# Altium PCB PCB2.PcbDoc
Units mm, origin at the board's own origin, x right, y up, seen from the top; angles counter-clockwise.
Board outline 160 x 101 mm, 2 copper layers (Top Layer, Bottom Layer); 127 components, 60 nets, 327 pads, 105 vias.
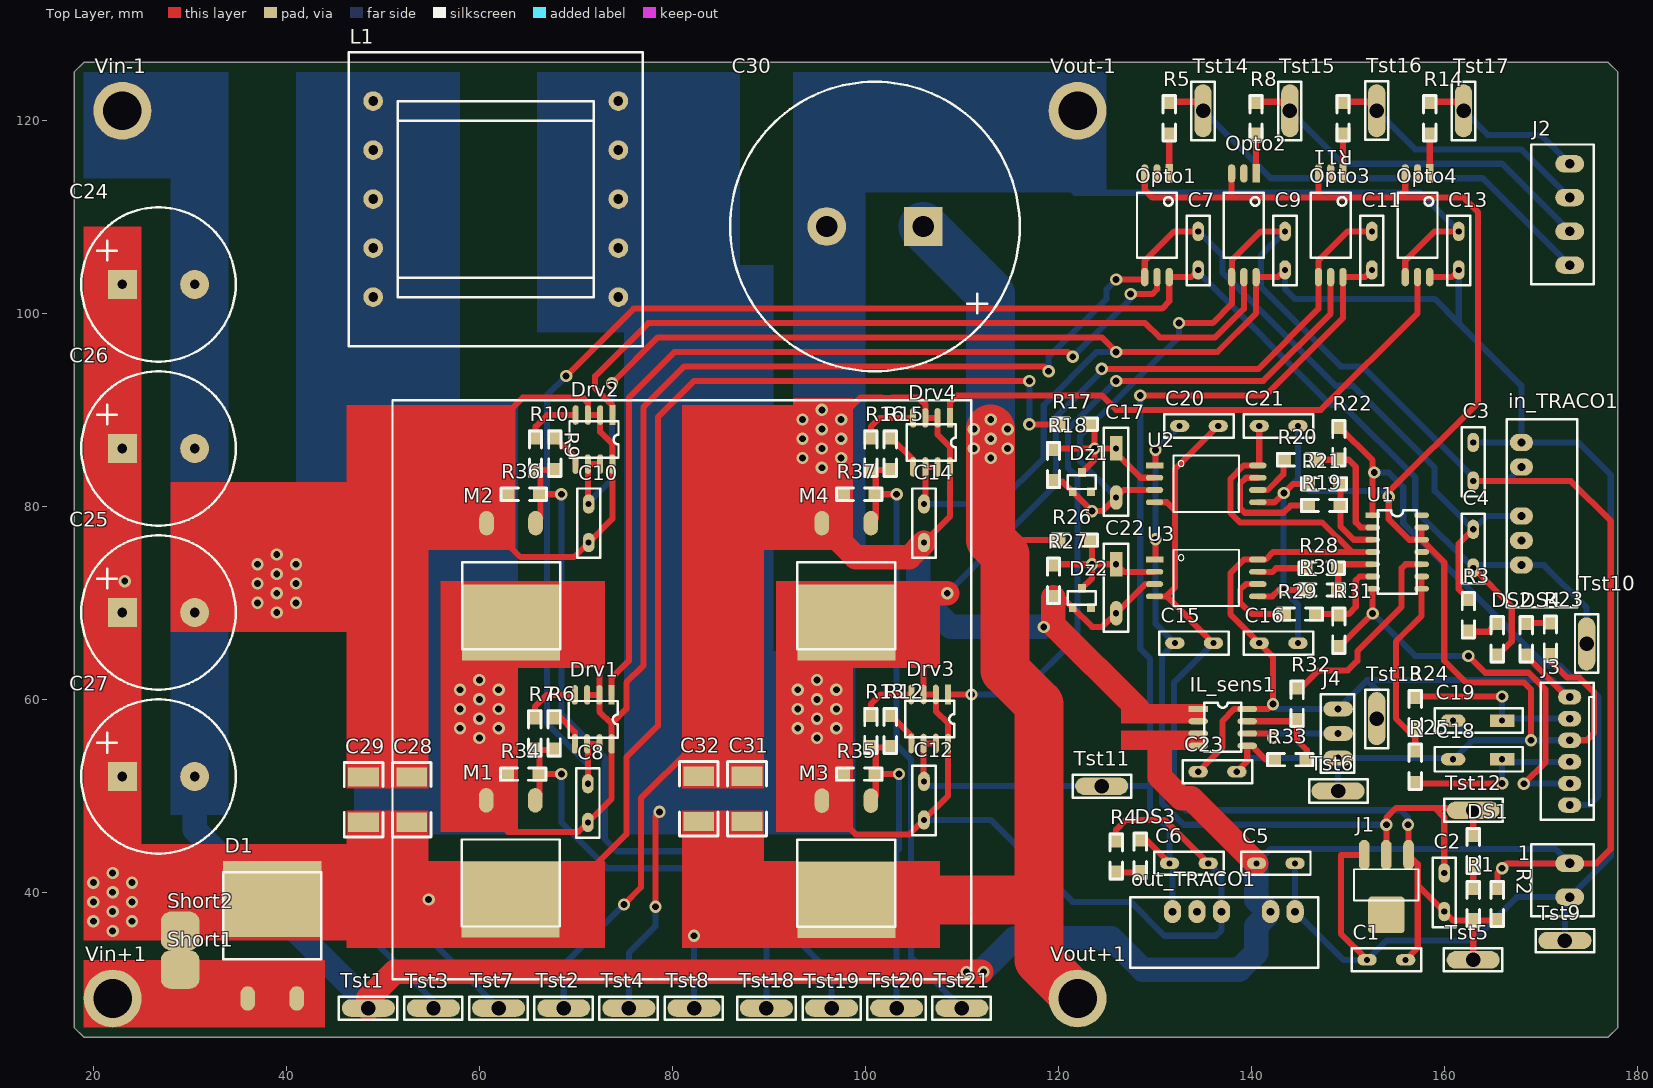
[diagram p0: Top Layer view]
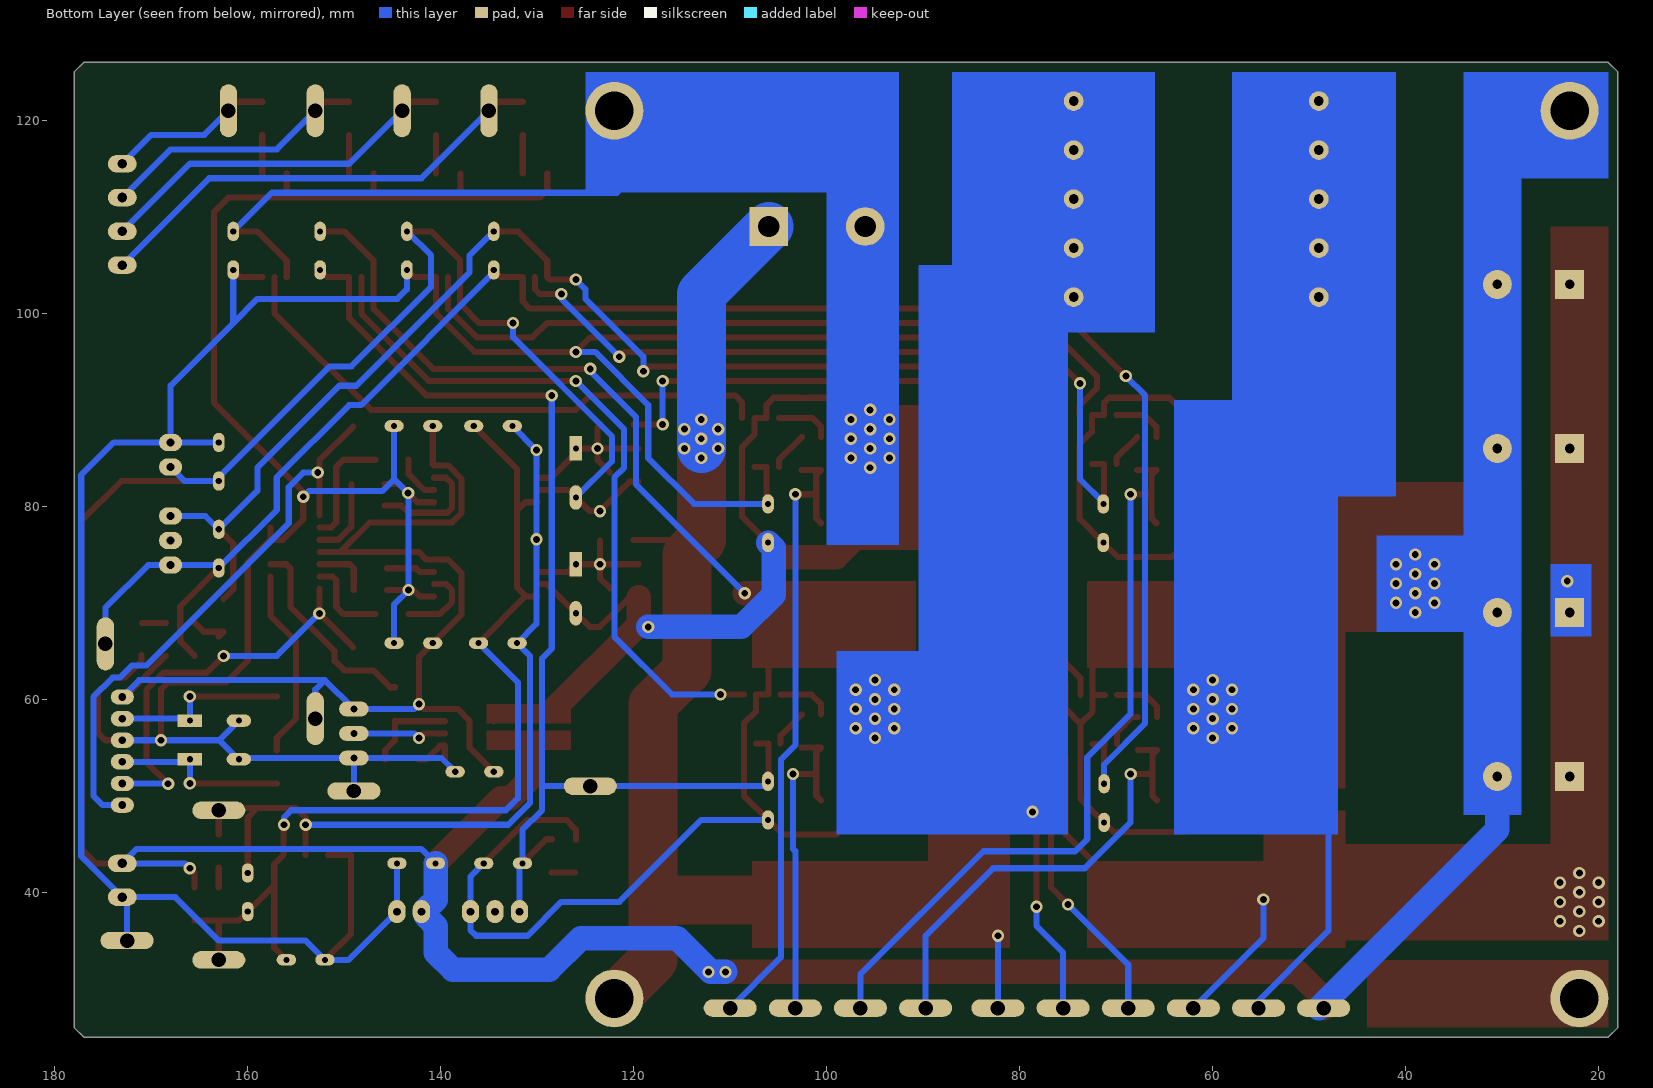
[diagram p1: Bottom Layer view, seen from below]

## Layer stack, top to bottom
Top Solder: solder mask 0.0102, Solder Resist, Dk 3.5
Top Layer: signal copper 0.0356
Dielectric 1: dielectric 0.32, FR-4, Dk 4.8
Bottom Layer: signal copper 0.0356
Bottom Solder: solder mask 0.0102, Solder Resist, Dk 3.5

## Board outline
18,125 19,126 177,126 178,125 178,26 177,25 19,25 18,26

## Design rules (kind name [scope] priority, off if disabled: settings)
Clearance Clearance_1 [All] p1: gap=0.3
Clearance [All] p2: gap=0.254
PolygonConnect [All] p1: connectstyle=Relief reliefconductorwidth=0.254 reliefentries=4 polygonreliefangle="90 Angle" airgapwidth=0.254
RoutingVias [All] p1: holewidth=0.711 width=1.27 viastyle="Through Hole" minholewidth=0.711 minwidth=1.27 maxholewidth=0.711 maxwidth=1.27
SolderMaskExpansion [All] p1: expansion=0.102
Width [All] p1: maxlimit=10 minlimit=0.3 preferedwidth=0.6
30 further rules are at their usual default settings.

## Classes and differential pairs
component class Signal_processing: B? C15 C16 C17 C18 C19 C20 C21 C22 C23 DS4 Dz1 Dz2 IL_sens1 J3 J4 R17 R18 R19 R20 R21 R22 R23 R24 R25 R26 R27 R28 R29 R30 R31 R32 R33 U1 U2 U3 U?
component class Drivers: C7 C8 C9 C10 C11 C12 C13 C14 C? Drv1 Drv2 Drv3 Drv4 IC? J2 Opto1 Opto2 Opto3 Opto4 R5 R6 R7 R8 R9 R10 R11 R12 R13 R14 R15 R16 Tst14 Tst15 Tst16 Tst17 Tst18 Tst19 Tst20 Tst21
component class Power_supplies: 1 C1 C2 C3 C4 C5 C6 DS1 DS2 DS3 in_TRACO1 J1 out_TRACO1 R1 R2 R3 R4 Tst1 Tst2 Tst3 Tst4 Tst5 Tst6 Tst7 Tst8 Tst9 Tst10 Tst11 Tst12 Tst13
component class Switches: C24 C25 C26 C27 C28 C29 C31 C32 D1 L1 M1 M2 M3 M4 R34 R35 R36 R37 Short1 Short2 Vin+1 Vin-1 Vout+1 Vout-1

## Components (designator, comment, footprint, x,y, rotation, side; value= is the part's Value field where it differs from the comment)
1 "Cleva 2 vias" "CON2_EXTRON _3.5MMPITCH" 173,43 r270 top
C1 "100nF" CAP100NF_AAU 156,33 r180 top
C2 "100nF" CAP100NF_AAU 160,38 r90 top
C3 "100nF" CAP100NF_AAU 163,82.62 r90 top
C4 "100nF" CAP100NF_AAU 163,73.62 r90 top
C5 "100nF" CAP100NF_AAU 140.54,43 r0 top
C6 "100nF" CAP100NF_AAU 131.54,43 r0 top
C7 "100nF" CAP100NF_AAU 134.5,104.5 r90 top
C8 "100nF" CAP100NF_AAU 71.253,47.25 r90 top
C9 "100nF" CAP100NF_AAU 143.5,104.5 r90 top
C10 "100nF" CAP100NF_AAU 71.33,76.25 r90 top
C11 "100nF" CAP100NF_AAU 152.5,104.5 r90 top
C12 "100nF" CAP100NF_AAU 106.08,47.5 r90 top
C13 "100nF" CAP100NF_AAU 161.5,104.5 r90 top
C14 "100nF" CAP100NF_AAU 106.08,76.25 r90 top
C15 "100nF" CAP100NF_AAU 136.08,65.83 r180 top
C16 "100nF" CAP100NF_AAU 144.83,65.83 r180 top
C17 "66nF" "CONDENSADOR_MKP_200MILIS - DUPLICATE" 126,86 r270 top
C18 "4.7nF" "CONDENSADOR_MKP_200MILIS - DUPLICATE" 166,53.79 r180 top
C19 "470pF" "CONDENSADOR_MKP_200MILIS - DUPLICATE" 166,57.79 r180 top
C20 "100nF" CAP100NF_AAU 136.58,88.33 r180 top
C21 "100nF" CAP100NF_AAU 144.83,88.33 r180 top
C22 "27nF" "CONDENSADOR_MKP_200MILIS - DUPLICATE" 126,74 r270 top
C23 "100nF" CAP100NF_AAU 138.5,52.5 r180 top
C24 "470µF" CE_16DX35MM_PITCH7.5MM 23,103 r0 top
C25 "470µF" CE_16DX35MM_PITCH7.5MM 23,69 r0 top
C26 "470µF" CE_16DX35MM_PITCH7.5MM 23,86 r0 top
C27 "470µF" CE_16DX35MM_PITCH7.5MM 23,52 r0 top
C28 "100nF" 1812 53,47.25 r90 top
C29 "1uF" 1812 48,47.25 r90 top
C30 "820µF" CE_30DX35MM_PITCH10MM 106,109 r180 top
C31 "100nF" 1812 87.739,47.338 r90 top
C32 "1uF" 1812 82.739,47.338 r90 top
D1 "????" "D2PAK - DIODE" 36,29 r0 top
Drv1 "NCP81074A" NCP81074A 73.713,60.463 r270 top
Drv2 "NCP81074A" NCP81074A 73.79,89.463 r270 top
Drv3 "NCP81074A" NCP81074A 108.58,60.5 r270 top
Drv4 "NCP81074A" NCP81074A 108.761,89.162 r270 top
DS1 "Verde" "LED SMD" 163,46 r270 top
DS2 "Verde" "LED SMD" 165.5,64.5 r90 top
DS3 "Verde" "LED SMD" 128.5,45.5 r270 top
DS4 "Verde" "LED SMD" 168.5,64.5 r90 top
Dz1 "4.7V" "SOT23 - ZENNER" 121.5,81.5 r0 top
Dz2 "4.7V" "SOT23 - ZENNER" 121.5,69.5 r0 top
IL_sens1 "ACS723LLCTR-20AB-T" SOIC8_GND 134.5,59 r0 top
in_TRACO1 "TRACO" TRACO_TMA1212S 168,86.62 r270 top
J1 "LD1117" SOT-223_LM1117 154,40.766 r180 top
J2 "CON4" "CON4_EXTRON _3.5MMPITCH" 173,115.5 r270 top
J3 "CON6" ? 173,49.04 r90 top
J4 "Cleva 2 vias" CON_3_100MILIS 149,59 r0 top
L1 "mH" E30 49,122 r0 top
M1 "MOSFET N" "D2PAK - MOSFET" 65.793,49.537 r180 top
M2 "MOSFET N" "D2PAK - MOSFET" 65.83,78.25 r180 top
M3 "MOSFET N" "D2PAK - MOSFET" 100.58,49.5 r180 top
M4 "MOSFET N" "D2PAK - MOSFET" 100.58,78.25 r180 top
Opto1 "ACPL-W70L" SSOIC6 131.5,114.5 r270 top
Opto2 "ACPL-W70L" SSOIC6 140.5,114.5 r270 top
Opto3 "ACPL-W70L" SSOIC6 149.5,114.5 r270 top
Opto4 "ACPL-W70L" SSOIC6 158.5,114.5 r270 top
out_TRACO1 "TRACO" TRACO_TMA1212S 144.54,38 r180 top
R1 "RK" 1206 163,40.5 r270 top
R2 "Res. Bridge" 1206 165.5,40.5 r270 top
R3 "RK" 1206 162.5,67 r90 top
R4 "RK" 1206 126,42 r90 top
R5 "560OHM" 1206 131.5,118.5 r90 top
R6 "25" 1206 67.753,54.75 r90 top
R7 "560OHM" 1206 65.753,54.75 r90 top
R8 "560OHM" 1206 140.5,118.5 r90 top
R9 "560OHM" 1206 67.83,83.75 r90 top
R10 "560OHM" 1206 65.83,83.75 r90 top
R11 "560OHM" 1206 149.5,118.5 r90 top
R12 "560OHM" 1206 102.58,55 r90 top
R13 "560OHM" 1206 100.58,55 r90 top
R14 "560OHM" 1206 158.5,118.5 r90 top
R15 "560OHM" 1206 102.58,83.75 r90 top
R16 "560OHM" 1206 100.58,83.75 r90 top
R17 "47k" 1206 120,88.5 r0 top
R18 "2k" 1206 119.5,86 r270 top
R19 "11k" 1206 145.83,80.08 r0 top
R20 "11k" 1206 143.33,84.83 r0 top
R21 "27k" 1206 149.255,82.33 r180 top
R22 "27k" 1206 149.08,84.83 r90 top
R23 "RK" 1206 171,68 r270 top
R24 "6k8" 1206 157,60.29 r270 top
R25 "680k" 1206 157,51.29 r90 top
R26 "120k" 1206 120,76.5 r0 top
R27 "2k" 1206 119.5,74 r270 top
R28 "11k" 1206 145.58,73.58 r0 top
R29 "11k" 1206 143.33,68.83 r0 top
R30 "27k" 1206 149.005,71.33 r180 top
R31 "27k" 1206 149.08,68.83 r270 top
R32 "10k" 1206 144.75,61.25 r270 top
R33 "10k" 1206 145.75,53.75 r180 top
R34 "68K" 1206 66.253,52.25 r180 top
R35 "68K" 1206 101.08,52.25 r180 top
R36 "68K" 1206 66.33,81.25 r180 top
R37 "68K" 1206 101.08,81.25 r180 top
Short1 "CON1" SHORTPAD 29,32 r270 top
Short2 "CON1" SHORTPAD 29,36 r270 top
Tst1 "Test Point" TEST_POINT 48.5,28 r90 top
Tst2 "Test Point" TEST_POINT 68.75,28 r90 top
Tst3 "Test Point" TEST_POINT 55.25,28 r90 top
Tst4 "Test Point" TEST_POINT 75.5,28 r90 top
Tst5 "Test Point" TEST_POINT 163,33 r90 top
Tst6 "Test Point" TEST_POINT 149,50.5 r270 top
Tst7 "Test Point" TEST_POINT 62,28 r90 top
Tst8 "Test Point" TEST_POINT 82.25,28 r90 top
Tst9 "Test Point" TEST_POINT 172.5,35 r270 top
Tst10 "Test Point" TEST_POINT 174.75,65.75 r0 top
Tst11 "Test Point" TEST_POINT 124.5,51 r270 top
Tst12 "Test Point" TEST_POINT 163,48.5 r270 top
Tst13 "Test Point" TEST_POINT 153,58 r180 top
Tst14 "Test Point" TEST_POINT 135,121 r180 top
Tst15 "Test Point" TEST_POINT 144,121 r180 top
Tst16 "Test Point" TEST_POINT 153,121 r0 top
Tst17 "Test Point" TEST_POINT 162,121 r180 top
Tst18 "Test Point" TEST_POINT 89.75,28 r270 top
Tst19 "Test Point" TEST_POINT 96.5,28 r270 top
Tst20 "Test Point" TEST_POINT 103.25,28 r90 top
Tst21 "Test Point" TEST_POINT 110,28 r90 top
U1 "LMC6484IM" SOIC_14 152.58,79.08 r0 top
U2 "ACPL-C870-000E" SSOP8 135.33,82.33 r0 top
U3 "ACPL-C870-000E" SSOP8 135.33,72.58 r0 top
Vin+1 "CON1" POWERHOLE 22,29 r0 top
Vin-1 "CON1" POWERHOLE 23,121 r0 top
Vout+1 "CON1" POWERHOLE 122,29 r0 top
Vout-1 "CON1" POWERHOLE 122,121 r0 top

## Footprints (in the part's own frame and the unit in brackets; to place one, negate y for a bottom-side part, rotate by r counter-clockwise, add the part's x,y. Pads: shape width x height; smd on the part's side, far side on the other; paste and mask are expansions set on the pad)
1206 [mil] "SMD R&C"
  rect 60x60 smd: 1(0,0) 2(135,0)
  silkscreen extent -25,-25 160,25, body extent 2,-31 128,31
1812 [mm]
  rect 2x3.2 smd: 1(0,0) 2(4.7,0)
  silkscreen extent -1.5,-2 6.2,2
CAP100NF_AAU [mm] "10nF 1600v"
  oval 2x1.2 hole 0.635: 1(0,0) 2(4,0)
  silkscreen extent -1.6,-1.2 5.6,1.2
CE_16DX35MM_PITCH7.5MM [mm]
  rect 3x3 hole 1: 1(0,0)
  round 3 hole 1: 2(7.5,0)
  silkscreen extent -4.25,-8 11.75,8
CE_30DX35MM_PITCH10MM [mm]
  rect 4x4 hole 2.2: 1(0,0)
  round 4 hole 2.2: 2(10,0)
  silkscreen extent -10,-15 20,15
"CON2_EXTRON _3.5MMPITCH" [mm]
  oval 1.8x3 hole 1: 1(0,0) 2(3.5,0)
  silkscreen extent -2,-4 5.5,2.5
"CON4_EXTRON _3.5MMPITCH" [mm]
  oval 1.8x3 hole 1: 1(0,0) 2(3.5,0) 3(7,0) 4(10.5,0)
  silkscreen extent -2,-4 12.5,2.5
CON_3_100MILIS [mil]
  oval 120x60 hole 29.53: 1(0,0) 2(0,-100) 3(0,-200)
  silkscreen extent -70,-260 65,60
"CONDENSADOR_MKP_200MILIS - DUPLICATE" [mm] "10nF 1600v"
  rect 2.54x1.27 hole 0.635: 1(0,0)
  oval 2.54x1.27 hole 0.635: 2(5.08,0)
  silkscreen extent -2.12,-1.27 6.98,1.27
"D2PAK - DIODE" [mil] "TO220-superficie"
  oval 60x100 smd: A(0,0) A(200,0)
  rect 400x310 smd: K(100,405)
  silkscreen extent -100,160 300,515
"D2PAK - MOSFET" [mil] "TO220-superficie"
  rect 400x310 smd: D(100,405)
  oval 60x100 smd: G(0,0) S(200,0)
  silkscreen extent -100,160 300,515
E30 [mil]
  round 80 hole 40: 1(0,-800) 1(0,-600) 1(0,-400) 1(0,-200) 1(0,0) 2(1000,-800) 2(1000,-600) 2(1000,-400) 2(1000,-200) 2(1000,0)
  silkscreen extent -100,-1000 1100,200
"LED SMD" [mil] "SMD R&C"
  rect 60x60 smd: A(0,0) K(135,0)
  silkscreen extent -25,-25 160,25
NCP81074A [mil] "Driver"
  rect 80x25 smd: 1(0,0)
  oval 80x25 smd: 2(0,-50) 3(0,-100) 4(0,-150) 5(200,-150) 6(200,-100) 7(200,-50) 8(200,0)
  silkscreen extent 25,-175 175,25
POWERHOLE [mm]
  round 6 hole 4: 1(0,0)
SHORTPAD [mm]
  rrect50% 4x4 smd: 1(0,0)
SOIC8_GND [mil] "Con plano de masa inferior"
  rect 80x25 smd: 1(0,0)
  oval 80x25 smd: 2(0,-50) 3(0,-100) 4(0,-150) 5(200,-150) 6(200,-100) 7(200,-50) 8(200,0)
  silkscreen extent 25,-175 175,25
SOIC_14 [mil]
  rect 60x24 smd: 1(0,0)
  oval 60x24 smd: 2(0,-50) 3(0,-100) 4(0,-150) 5(0,-200) 6(0,-250) 7(0,-300) 8(200,-300) 9(200,-250) 10(200,-200) 11(200,-150) 12(200,-100) 13(200,-50) 14(200,0)
  silkscreen extent 20,-320 180,20
"SOT23 - ZENNER" [mm] "Transistor SMD"
  rect 0.8x0.9 smd: A(0,0) K(0.95,2) NC(1.9,0)
  silkscreen extent -0.5,0.3 2.4,1.7
SOT-223_LM1117 [mm] "SOT-223/SC-73; 4 Leads; Body 6.7 x 7.3 mm, inc. leads (LxW max)"
  oval 1.1x3.15 smd: 1(-2.3,-3.1) 2(0,-3.1) 3(2.3,-3.1)
  rrect20% 3.8x3.8 smd: ""(0,3.1)
  silkscreen extent -3.35,-1.63 3.35,1.63
SSOIC6 [mm] "Circuito de 6 patas SMD"
  rect 1.91x0.762 smd: 1(0,0)
  oval 1.91x0.762 smd: 2(0,-1.27) 3(0,-2.54) 4(10.74,-2.54) 5(10.74,-1.27) 6(10.74,0)
  silkscreen extent 2,-3.34 8.74,0.8
SSOP8 [mm]
  rect 1.8x0.6 smd: 1(-5.35,1.905)
  oval 1.8x0.6 smd: 2(-5.35,0.635) 3(-5.35,-0.635) 4(-5.35,-1.905) 5(5.35,-1.905) 6(5.35,-0.635) 7(5.35,0.635) 8(5.35,1.905)
  silkscreen extent -3.4,-2.93 3.4,2.93
TEST_POINT [mm]
  oval 1.8x5.5 hole 1.5: 1(0,0)
  silkscreen extent -1.2,-3 1.2,3.05
TRACO_TMA1212S [mm]
  oval 1.8x2.4 hole 0.8: 1(0,0) 2(2.54,0) 4(7.62,0) 5(10.16,0) 6(12.7,0)
  silkscreen extent -2.4,-1.5 17.1,5.8
? [mm]
  oval 1.6x2.4 hole 0.8: 1(0,0) 2(2.24,0) 3(4.48,0) 4(6.72,0) 5(8.96,0) 6(11.2,0)
  silkscreen extent -1.5,-2.5 12.7,3

## Part data
1: library part Con_2
C1 C2 C3 C4 C5 C6 C7 C8 C9 C10 C11 C12 C13 C14 C15 C16 C17 C18 C19 C20 C21 C22 C23 C28 C29 C31 C32: library part Condensador, "Condensador"
C24 C25 C26 C27 C30: library part Cond_Electrolítico, "Condensador Aluminio con polaridad"
D1: library part Diodo, "Diodo"
DS1 DS2 DS3 DS4: library part Led
Dz1 Dz2: library part Zener
IL_sens1: "Current Sensor AC/DC 5V 8-Pin SOIC N Allegro Microsystems ACS723LLCTR-20AB-T, Current Sensor, 8-Pin, SOIC"
in_TRACO1 out_TRACO1: "TracoPower TMA1212S"
J1: "Linear voltage regulator"
J3: "CONECTOR 6 PINES"
J4: library part Con_3
L1: library part Bobina
M1 M2 M3 M4: "MOSFET de canal N"
R1 R3 R4 R5 R6 R7 R8 R9 R10 R11 R12 R13 R14 R15 R16 R17 R18 R19 R20 R21 R22 R23 R24 R25 R26 R27 R28 R29 R30 R31 R32 R33 R34 R35 R36 R37: library part Resistencia, "Resistencia"
R2: "Resistencia Bridge"
U1: library part LMC6484IM_1, "14 pin CMOS Quad Rail to Rail Input and Output Operational Amplifier 55 per tube"
U2 U3: "Isolation Amplifier [Broadcom] ACPL-C870-000E Isolation Amplifier"

## Via types
v1: diameter 1.27, hole 0.711, Top Layer to Bottom Layer, 105 vias

## Nets (pads, with @x,y where several pads share a name; then routed paths per layer and width w, separated by ;. In a path a pad name is that pad's centre, name@x,y a point inside that pad or via, vN(x,y) a via of type N, cw(c..) or ccw(c..) an arc to the next point about the centre after c; other vN are vias at no path point)
5V_HV: C2.2 C15.2 C20.2 DS1.A J1.2 Tst12.1 U2.1 U3.1 | length 92.4
  Top Layer w0.635: U2.1 130.08,84.335 v1(130.08,85.83) ; U3.1@130.08,74.585 v1(130.08,76.58) ; J1.2 154,47.75 155,48.75 159,48.75 ; C2.2 160,47.75 159,48.75 ; DS1.A Tst12.1 162.75,48.75 159,48.75
  Bottom Layer w0.635: C20.2 v1(130.08,85.83) v1(130.08,76.58) 130.08,67.83 C15.2 130.75,64.5 130.75,49.25 133,47 v1(154,47)
5V_LV: C16.2 C21.2 C23.2 DS4.A IL_sens1.8 J3.6 J4.1 Tst13.1 U1.4 U2.8 U3.8 | length 112.3
  Top Layer w0.635: C23.2 137,55 137,57.75 138.25,59 IL_sens1.8 141.75,59 v1(142.25,59.5) 142.25,64.41 C16.2 137.83,68.83 137.83,73.08 139.235,74.485 U3.8 141.485,74.485 142.27,75.27 150.39,75.27 ; C21.2 140.83,84.385 U2.8 139.235,84.235 137.83,82.83 137.83,79.33 138.83,78.33 147.33,78.33 150.39,75.27 ; U1.4 150.39,75.27 ; DS4.A 172.76,60.24 J3.6
  Bottom Layer w0.635: v1(142.25,59.5) 142.75,59 J4.1 152,62 ; Tst13.1 153,61 152,62 ; J3.6 171.24,62 152,62
12V_HV_HS_IN: C4.1 C7.1 C8.2 Drv1.6 Drv1.7 DS2.A in_TRACO1.6 Opto1.6 Tst10.1 | length 194.1
  Top Layer w0.635: v1(69,93.5) 76,100.5 130.75,100.5 131.5,101.25 Opto1.6 133.76,103.76 C7.1 ; C8.2 71.253,55.303 Drv1.6 Drv1.7 ; C4.1 167,69.62 167,66 DS2.A
  Bottom Layer w0.635: v1(69,93.5) 67,91.5 67,57.5 71.253,53.247 C8.2 ; C7.1 134.5,104.25 148.25,90.5 149.5,90.5 157,83 157,79.62 C4.1 163.3,73.92 in_TRACO1.6 170.33,73.92 174.75,69.5 Tst10.1
12V_HV_HS_OUT: C6.1 C11.1 C12.2 Drv3.6 Drv3.7 DS3.A Opto3.6 out_TRACO1.6 Tst11.1 | length 119.7
  Top Layer w0.635: C12.2 106.04,51.54 Drv3.6 Drv3.7 ; DS3.A 129.04,45.5 C6.1 ; v1(128.5,91.5) 141.5,91.5 149.5,99.5 Opto3.6 151.76,103.76 C11.1
  Bottom Layer w0.635: C12.2 106.58,51 Tst11.1 129.5,51 ; v1(128.5,91.5) 128.5,65.25 129.5,64.25 129.5,51 ; out_TRACO1.6 131.84,42.7 C6.1 131.54,46.46 129.5,48.5 129.5,51
12V_HV_LS: 1.2 C1.2 C3.2 C5.2 C9.1 C10.2 C13.1 C14.2 Drv2.6 Drv2.7 Drv4.6 Drv4.7 in_TRACO1.1 J1.3 Opto2.6 Opto4.6 out_TRACO1.1 Tst9.1 | length 295.7
  Top Layer w0.635: C10.2 71.25,80.33 Drv2.6 Drv2.7 ; v1(73.75,92.75) 78.5,97.5 124.5,97.5 v1(126,96) 136.5,96 140.5,100 Opto2.6 142.76,103.76 C9.1 ; C14.2 106.221,80.391 Drv4.6 Drv4.7 ; J1.3 149.283,43.866 149.283,35.717 C1.2 ; Opto4.6 160.76,103.76 C13.1
  Bottom Layer w0.635: C10.2 71.25,80.33 73.75,82.83 v1(73.75,92.75) ; C14.2 113.75,80.25 118.5,85 118.5,90.5 124,96 v1(126,96) ; C9.1 143.5,102.5 144.5,101.5 159,101.5 161.5,99 ; C5.2 out_TRACO1.1 149.54,33 C1.2 154,35 163,35 167.5,39.5 1.2 ; C13.1 161.5,99 ; C3.2 in_TRACO1.1 ; Tst9.1 172.5,39 1.2 ; 161.5,99 168,92.5 in_TRACO1.1 ; in_TRACO1.1 173.88,86.62 177.25,83.25 177.25,43.75 1.2
GND_HV_HS_IN: C4.2 C7.2 C8.1 Drv1.2 Drv1.3 Drv1.8 in_TRACO1.4 L1.1 M1.S M2.D Opto1.4 R3.2 R34.2 Tst3.1 | length 217.2
  Top Layer w0.635: M1.S@60.713,48.537 63,46.25 70.253,46.25 73.713,49.71 Drv1.8 73.713,57.463 ; Drv1.3 Drv1.2 ; 72.443,67.807 Drv1.2 ; v1(119,94) 118.5,94.5 81.25,94.5 77,90.25 77,63.5 75.25,61.75 75.25,59 73.713,57.463 ; v1(126,103.5) 128.7,103.5 Opto1.4 128.96,105.46 132,108.5 C7.2 ; R3.2 161.5,71.429 161.5,76.12 C4.2 ; Drv1.2 72.443,58.733 73.713,57.463
  Bottom Layer w0.635: 48,47 48,36 Tst3.1@56,28 ; v1(119,94) 119,95.5 125,101.5 125,102.5 v1(126,103.5) ; C7.2 137,106 137,104.25 148.75,92.5 150.5,92.5 159,84 159,81.62 C4.2 164.38,79 in_TRACO1.4
  other v1: 60,56 58,57 62,57 60,58 58,59 62,59 60,60 58,61 62,61 60,62
GND_HV_HS_OUT: C6.2 C11.2 C12.1 Drv3.2 Drv3.3 Drv3.8 L1.2 M3.S M4.D Opto3.4 out_TRACO1.4 R4.2 R35.2 Tst4.1 | length 181.1
  Top Layer w0.635: v1(78.25,38.5) 78.25,47.928 v1(78.661,48.339) ; M3.S 99,46 104.58,46 C12.1 108.58,50 Drv3.8 108.58,57.5 107.31,58.77 Drv3.2 Drv3.3 106.04,65.46 ; v1(124.502,94.252) 140.752,94.252 146.96,100.46 Opto3.4 146.96,105.46 150,108.5 C11.2 ; R4.2 126,46.5 127,47.5 131.04,47.5 C6.2
  Top Layer w2.54: 106,71 v1(108.5,71)
  Bottom Layer w0.635: Tst4.1 75.5,33.75 78.25,36.5 v1(78.25,38.5) ; C12.1 113,47.5 121.5,39 127.5,39 131,35.5 136.34,35.5 136.92,36.08 out_TRACO1.4 136.92,41.62 C6.2 ; v1@108.25,70.75 v1(108.5,71) 119.75,82.25 119.75,89.25 124.502,94.002 v1(124.502,94.252)
  other v1: 95,56 93,57 97,57 95,58 93,59 97,59 95,60 93,61 97,61 95,62
GND_HV_LS_IN: 1.1 C3.1 C5.1 C9.2 C10.1 C17.2 C24.2 C25.2 C26.2 C27.2 C28.2 C29.2 Drv2.2 Drv2.3 Drv2.8 Dz1.A IL_sens1.3 IL_sens1.4 in_TRACO1.2 M2.S Opto2.4 out_TRACO1.2 R2.1 R18.2 R36.2 Tst1.1 U2.3 Vin-1.1 | length 401.4
  Top Layer w0.635: M2.S 64.25,74.75 69.83,74.75 C10.1 73.79,78.71 Drv2.8 73.79,86.463 72.52,87.733 Drv2.2 Drv2.3 71.25,90.75 70.75,91.25 64.5,91.25 62,88.75 ; R18.2 120.429,82.571 Dz1.A v1(123.5,79.5) 124.58,79.5 C17.2 126.775,81.695 U2.3 ; v1(132.5,99) 136,99 138,101 Opto2.4@138,103.8 ; IL_sens1.4 IL_sens1.3 ; Opto2.4 Opto2.4@138,103.8 ; C9.2 141,108.5 138,105.5 Opto2.4@138,103.8 ; C3.1 173.13,82.62 177.25,78.5 177.25,44.5 175.75,43 1.1 166.5,43 v1(166,42.5) 165.5,42 R2.1
  Top Layer w2.54: Tst1.1 48.5,29 51.25,31.75 v1(110.5,31.75) v1@112,31.75 ; 130.5,54.75 130.5,52 132.75,49.75 133.79,49.75 C5.1
  Bottom Layer w0.635: C17.2 122.25,84.67 122.25,87.25 132.5,97.5 v1(132.5,99) ; C5.1 142.04,44.5 171.5,44.5 1.1 166.5,43 v1(166,42.5) ; C9.2 141,106 141,102.75 149.25,94.5 151.5,94.5 163,83 C3.1 166.54,82.62 in_TRACO1.2
  Bottom Layer w2.54: C27.2 30.5,46.5 Tst1.1@49,28 ; v1(110.5,31.75) 112,31.75 115.5,35.25 125.5,35.25 128.75,32 138.75,32 140.5,33.75 140.5,36.5 141.5,37.5 141.5,38.29 140.54,39.25 C5.1
  other v1: 112.25,31.75 39,69 37,70 41,70 39,71 37,72 41,72 39,73 37,74 41,74 39,75
GND_HV_LS_OUT: C13.2 C14.1 C22.2 C30.2 C31.2 C32.2 Drv4.2 Drv4.3 Drv4.8 Dz2.A IL_sens1.1 IL_sens1.2 M4.S Opto4.4 R27.2 R37.2 Tst2.1 U3.3 Vout-1.1 | length 188
  Top Layer w0.635: v1(75,38.75) 76.75,40.5 76.75,49.75 82,55 84,55 ; 98,89.75 99.5,91.25 101.729,91.25 101.731,91.248 102.769,91.248 102.771,91.25 105.5,91.25 106.221,90.529 Drv4.3 Drv4.2 107.491,87.432 108.761,86.162 Drv4.8 108.761,78.931 C14.1 ; R27.2 120.429,70.571 Dz2.A 123.5,67.5 124.58,67.5 C22.2 129.025,71.945 U3.3 ; 132,59 IL_sens1.1 IL_sens1.2 ; Opto4.4 155.96,105.46 159,108.5 C13.2
  Top Layer w2.54: M4.S 99,74.75 104.58,74.75 C14.1 ; R27.2 119.5,67.75 128.25,59
  Bottom Layer w0.635: Tst2.1 68.75,32.5 v1(75,38.75) ; 117.625,116.625 121.75,112.5 157.5,112.5 C13.2
  Bottom Layer w2.54: C14.1 105.5,75.67 105.5,70.831 108.831,67.5 v1(118.5,67.5)
  Bottom Layer w5.08: 117.625,116.625 Vout-1.1
  other v1: 95.5,84 93.5,85 97.5,85 95.5,86 93.5,87 97.5,87 95.5,88 93.5,89 97.5,89 95.5,90
GND_HV_SENSORS: C1.1 C2.1 C15.1 C20.1 J1.1 R1.2 R2.2 Tst5.1 U2.4 U3.4 | length 102.8
  Top Layer w0.635: U3.4 131.175,70.675 132.08,71.58 132.08,79.58 ; U2.4 131.235,80.425 132.08,79.58 ; 131.235,70.675 C15.1 ; C20.1 132.08,83.83 132.08,79.58 ; C1.1 157.25,34.25 157.25,40.75 ; v1(156.25,47) 156.3,46.95 J1.1 157.25,42.916 157.25,40.75 ; Tst5.1 R1.2 ; R2.2 R1.2 ; 157.25,40.75 C2.1 160.929,37.071 R1.2
  Bottom Layer w0.635: C15.1 132,61.75 132,49.75 133.25,48.5 155.5,48.5 156.25,47.75 v1(156.25,47)
GND_LV: C16.1 C18.2 C19.2 C21.1 C23.1 IL_sens1.5 J3.4 J4.3 Opto1.3 Opto2.3 Opto3.3 Opto4.3 R21.2 R23.2 R30.2 R33.2 Tst6.1 U1.11 U1.12 U1.13 U2.5 U3.5 | length 221.2
  Top Layer w0.635: Opto1.3 128.96,112.79 129.75,112 155.25,112 ; 137.96,112.04 Opto2.3 ; C23.1 139.58,53.58 IL_sens1.5 140.06,55.19 141.5,53.75 R33.2 ; U3.5 142.175,70.675 142.83,71.33 v1(143.33,71.33) R30.2 ; U2.5 142.425,80.425 v1(143.378,81.377) 144.33,82.33 R21.2 ; 146.96,112.04 Opto3.3 ; Opto4.3 155.96,112.71 155.25,112 ; U1.13 U1.12 ; v1(169,55.76) 169,61 168.25,61.75 162.25,61.75 160,64 160,74.2 U1.12 ; R23.2 171,64 172.75,62.25 174,62.25 175.5,60.75 175.5,56.5 174.76,55.76 J3.4 ; 155.25,112 162,112 163.5,110.5 163.5,90.75 154.25,81.5 v1(154.25,81) 154.25,78.66 156.37,76.54 U1.12
  Bottom Layer w0.635: C23.1 139.92,53.92 J4.3 Tst6.1 ; v1@143.33,81.33 v1(143.33,71.33) 144.83,69.83 C16.1 ; v1(143.378,81.377) 144.83,82.83 ; C21.1@144.83,87.83 144.83,82.83 ; J4.3@149.58,53.92 160.79,53.92 C18.2 160.98,53.79 162.95,55.76 ; v1(154.25,81) 153.67,81.58 146.08,81.58 144.83,82.83 ; C19.2 162.95,55.76 ; J3.4 v1(169,55.76) 162.95,55.76
NetC18_1: C18.1 J3.3 R25.1 | length 18.6
  Top Layer w0.635: R25.1 v1(166,51.29)
  Bottom Layer w0.635: v1(166,51.29) C18.1 166.27,53.52 J3.3
NetC19_1: C19.1 J3.5 R24.1 | length 18.6
  Top Layer w0.635: R24.1 v1(166,60.29)
  Bottom Layer w0.635: v1(166,60.29) C19.1 166.21,58 J3.5
NetD1_A: D1.A Short1.1 Vin+1.1
NetDrv1_1: Drv1.1 Opto1.5 | length 92.9
  Top Layer w0.635: Drv1.1 73.713,62.213 75.5,64 75.5,91.25 80.25,96 120.995,96 v1(121.495,95.5) ; v1(127.5,102) 129.75,102 130.23,102.48 Opto1.5
  Bottom Layer w0.635: v1(121.495,95.5) 127.5,101.505 v1(127.5,102)
NetDrv1_4: Drv1.4 R7.2 | length 5.7
  Top Layer w0.635: R7.2 65.753,59.25 66.966,60.463 Drv1.4
NetDrv1_5: Drv1.5 R6.2 | length 4
  Top Layer w0.635: R6.2 68.324,58.179 69.903,56.6 Drv1.5
NetDrv2_1: Drv2.1 Opto2.5 | length 79.4
  Top Layer w0.635: Drv2.1 73.79,90.46 72,92.25 72,93.5 77.5,99 129,99 130.5,97.5 136.25,97.5 139.23,100.48 Opto2.5
NetDrv2_4: Drv2.4 R10.2 | length 5.7
  Top Layer w0.635: R10.2 65.83,88.25 67.043,89.463 Drv2.4
NetDrv2_5: Drv2.5 R9.2 | length 3.7
  Top Layer w0.635: R9.2 69.98,85.029 Drv2.5
NetDrv3_1: Drv3.1 Opto3.5 | length 73.8
  Top Layer w0.635: Drv3.1 v1(111,60.5) ; v1(126,93) 141.25,93 148.23,99.98 Opto3.5
  Bottom Layer w0.635: v1(111,60.5) 116,60.5 122,66.5 122,83 121,84 121,88 v1(126,93)
NetDrv3_4: Drv3.4 R13.2 | length 5.7
  Top Layer w0.635: R13.2 100.58,59.5 101.58,60.5 Drv3.4
NetDrv3_5: Drv3.5 R12.2 | length 3.9
  Top Layer w0.635: R12.2 104.77,56.239 Drv3.5
NetDrv4_1: Drv4.1 Opto4.5 | length 58.9
  Top Layer w0.635: Drv4.1 108.761,90.761 109.5,91.5 124.5,91.5 126,90 147.21,90 157.23,100.02 Opto4.5
NetDrv4_4: Drv4.4 R16.2 | length 5.8
  Top Layer w0.635: R16.2 100.58,88.25 101.492,89.162 Drv4.4
NetDrv4_5: Drv4.5 R15.2 | length 4.1
  Top Layer w0.635: R15.2 104.951,84.808 Drv4.5
NetDS1_K: DS1.K R1.1 | length 2.1
  Top Layer w0.635: R1.1 DS1.K
NetDS2_K: DS2.K R3.1 | length 4.1
  Top Layer w0.635: R3.1@163,66.5 R3.1 164.571,67 DS2.K
NetDS3_K: DS3.K R4.1 | length 2.4
  Top Layer w0.635: R4.1@126.071,42.071 DS3.K
NetDS4_K: DS4.K R23.1 | length 2.4
  Top Layer w0.635: DS4.K R23.1@170.929,67.929
NetIL_sens1_6: IL_sens1.6 J4.2 | length 9.8
  Top Layer w0.635: IL_sens1.6 141.79,56.46 v1(142.25,56)
  Bottom Layer w0.635: v1(142.25,56) 142.71,56.46 J4.2
NetIL_sens1_7: IL_sens1.7 R32.2 R33.1 | length 9.6
  Top Layer w0.635: IL_sens1.7 R32.2@144.659,57.73 ; R32.2 144.75,55.75 145.75,54.75 R33.1
NetJ2_1: J2.1 R14.2 Tst17.1 | length 17.2
  Top Layer w0.635: R14.2 161.071,121.929 Tst17.1
  Bottom Layer w0.635: Tst17.1 164.5,118.5 170,118.5 J2.1
NetJ2_2: J2.2 R11.2 Tst16.1 | length 27.6
  Top Layer w0.635: R11.2 152.071,121.929 Tst16.1
  Bottom Layer w0.635: Tst16.1 157,117 168,117 J2.2
NetJ2_3: J2.3 R8.2 Tst15.1 | length 38.1
  Top Layer w0.635: R8.2 143.071,121.929 Tst15.1
  Bottom Layer w0.635: Tst15.1 149.5,115.5 166,115.5 J2.3
NetJ2_4: J2.4 R5.2 Tst14.1 | length 48.5
  Top Layer w0.635: R5.2 134.071,121.929 Tst14.1
  Bottom Layer w0.635: Tst14.1 142,114 164,114 J2.4
NetJ3_1: J3.1 R22.2 U1.1 | length 59.4
  Top Layer w0.635: R22.2 152.58,84.759 U1.1
  Bottom Layer w0.635: v1(152.75,83.5) 154.25,83.5 155.75,82 155.75,78.25 170.5,63.5 172,63.5 173.25,62.25 174,62.25 176,60.25 176,50 175.04,49.04 J3.1
NetJ3_2: J3.2 R31.2 U1.7 | length 44.1
  Top Layer w0.635: R31.2 v1(152.58,68.901) U1.7 ; v1(162.5,64.5) 164.25,62.75 168.75,62.75 170.5,61 170.5,53.5 v1(168.25,51.25)
  Bottom Layer w0.635: v1(152.58,68.901) 156.981,64.5 v1(162.5,64.5) ; v1@168.25,51.28 J3.2
NetM1_G: M1.G R6.1 R7.1 R34.1 Tst18.1 | length 48.5
  Top Layer w0.635: M1.G 66.253,49.997 R34.1 ; R6.1 R7.1 66.253,54.25 R34.1 ; v1(68.5,52.25) R34.1
  Bottom Layer w0.635: v1(68.5,52.25) 68.5,47.25 73.25,42.5 82.75,42.5 89.75,35.5 Tst18.1
NetM2_G: M2.G R9.1 R10.1 R36.1 Tst19.1 | length 80.5
  Top Layer w0.635: M2.G 66.33,78.75 R36.1 ; R9.1 R10.1 66.33,83.25 R36.1 ; v1(68.5,81.25) R36.1
  Bottom Layer w0.635: v1(68.5,81.25) 68.5,58.5 73,54 73,45.516 74.266,44.25 83.75,44.25 96.5,31.5 Tst19.1
NetM3_G: M3.G R12.1 R13.1 R35.1 Tst20.1 | length 34.7
  Top Layer w0.635: M3.G 101.08,50 R35.1 ; R12.1 R13.1 101.08,54.5 R35.1 ; v1(103.5,52.25) R35.1
  Bottom Layer w0.635: Tst20.1 103.25,44.25 103.5,44.5 v1(103.5,52.25)
NetM4_G: M4.G R15.1 R16.1 R37.1 Tst21.1 | length 66.1
  Top Layer w0.635: M4.G 101.08,78.75 R37.1 ; R15.1 R16.1 101.08,83.25 R37.1 ; v1(103.25,81.25) R37.1
  Bottom Layer w0.635: v1(103.25,81.25) 103.25,55.25 104.752,53.748 104.752,51.731 104.75,51.729 104.75,33.25 Tst21.1
NetOpto1_1: Opto1.1 R5.1 | length 4
  Top Layer w0.635: Opto1.1 R5.1
NetOpto2_1: Opto2.1 R8.1 | length 4
  Top Layer w0.635: Opto2.1 R8.1
NetOpto3_1: Opto3.1 R11.1 | length 4
  Top Layer w0.635: Opto3.1 R11.1
NetOpto4_1: Opto4.1 R14.1 | length 4
  Top Layer w0.635: Opto4.1 R14.1
NetR19_1: R19.1 U2.7 | length 12.1
  Top Layer w0.635: U2.7 139.465,82.965 138.83,82.33 138.83,79.83 139.33,79.33 143.33,79.33 144.08,80.08 R19.1
NetR19_2: R19.2 R21.1 U1.3 | length 8.3
  Top Layer w0.635: R21.1@149.259,82.33 149.259,77.901 150.62,76.54 U1.3
NetR20_1: R20.1 U2.6 | length 4.8
  Top Layer w0.635: U2.6 141.695,81.695 143.33,83.33 R20.1
NetR20_2: R20.2 R22.1 U1.2 | length 12.1
  Top Layer w0.635: R20.2 150.08,84.83 150.83,84.08 150.83,78.33 151.35,77.81 U1.2
NetR24_2: R24.2 R25.2 U1.8 U1.9 | length 19.9
  Top Layer w0.635: R25.2 157,56 155,58 155,66 157.66,68.66 U1.8 U1.9
NetR28_1: R28.1 U3.7 | length 5.1
  Top Layer w0.635: U3.7 142.215,73.215 142.58,73.58 R28.1
NetR28_2: R28.2 R30.1 U1.5 | length 6
  Top Layer w0.635: R30.1@149.009,71.334 R28.2 149.429,74 U1.5
NetR29_1: R29.1 U3.6 | length 8.4
  Top Layer w0.635: U3.6 139.445,71.945 138.83,71.33 138.83,70.08 140.08,68.83 R29.1
NetR29_2: R29.2 R31.1 U1.6 | length 9
  Top Layer w0.635: R29.2 R31.1 150.08,68.83 150.83,69.58 150.83,72.33 151.23,72.73 U1.6
NetR32_1: R32.1 U1.10 | length 21.1
  Top Layer w0.635: R32.1 145.25,61.25 147,63 150,63 151,64 151,65 155.58,69.58 155.58,73.58 156,74 U1.10
VIN: C24.1 C25.1 C26.1 C27.1 C28.1 C29.1 D1.K M1.D R17.1 Short2.1 Tst7.1 | length 112.8
  Top Layer w0.635: Tst7.1@63,28 Tst7.1@63.253,28.253 ; 71,41.75 75.25,46 75.25,54 78.5,57.25 78.5,89.25 82.25,93 v1(117,93) ; v1(117,88.5) R17.1
  Bottom Layer w0.635: v1(54.75,39.25) 54.75,35.25 Tst7.1 ; v1(117,88.5) v1(117,93)
  other v1: 22,36 20,37 24,37 22,38 20,39 24,39 22,40 20,41 24,41 22,42 23.25,72.25
VIN_SEN: C17.1 Dz1.K R17.2 R18.1 U2.2 | length 17.8
  Top Layer w0.635: R18.1 v1(123.75,86) ; Dz1.K 123.75,84.8 v1(123.75,86) ; R17.2 123.75,88.179 123.75,86.25 123.5,86 v1(123.75,86) ; U2.2 128.535,82.965 125.5,86 v1(123.75,86)
VOUT: C30.1 C31.1 C32.1 M3.D R26.1 Tst8.1 Vout+1.1 | length 121.8
  Top Layer w0.635: 114.5,76.5 R26.1
  Top Layer w5.08: M3.D 118,39.213 ; 113,88 113,76.5 114.5,75 114.5,63 118,59.5 118,33 Vout+1.1
  Bottom Layer w0.635: Tst8.1 v1@82.25,35.75
  Bottom Layer w5.08: C30.1 113,102 113,86
  other v1: 82.25,35.5 113,85 111.25,86 114.75,86 113,87 111.25,88 114.75,88 113,89
VOUT_SEN: C22.1 Dz2.K R26.2 R27.1 U3.2 | length 16.2
  Top Layer w0.635: R27.1 v1(123.5,74) ; Dz2.K 123.5,72.55 v1(123.5,74) ; R26.2@123.5,76.429 v1(123.5,74) ; U3.2 126.785,73.215 C22.1 v1(123.5,74)
pads on no net: Dz1.NC Dz2.NC in_TRACO1.5 J1. Opto1.2 Opto2.2 Opto3.2 Opto4.2 out_TRACO1.5 U1.14

## Other copper
Top Layer:
  rectangle net VIN: 19,35 25,109
  rectangle net GND_HV_LS_OUT: 92.5,90.5 98.75,91.25
  rectangle net GND_HV_LS_IN: 28,67 54,82.5
  rectangle net VIN: 19,35 54,45
  rectangle net NetD1_A: 19,26 44,33
  rectangle net GND_HV_LS_IN: 46.25,75.5 63.75,90.5
  rectangle net GND_HV_LS_IN: 46.25,50.75 54.75,90.5
  rectangle net VIN: 46.25,34.25 54.75,48.5
  rectangle net GND_HV_LS_OUT: 81,75.5 98.75,90.5
  rectangle net GND_HV_LS_OUT: 81,50.75 89.5,82.75
  rectangle net VOUT: 81,34.25 89.5,48.5
  rectangle net VOUT: 81.25,34.25 107.75,43.25
  rectangle net GND_HV_HS_OUT: 90.75,46.25 98.75,72.25
  rectangle net GND_HV_HS_OUT: 90.75,63.25 107.75,72.25
  rectangle net GND_HV_HS_IN: 56,63.25 73,72.25
  rectangle net GND_HV_HS_IN: 56,46.25 64,72.25
  rectangle net VIN: 46.5,34.25 73,43.25
  rectangle net GND_HV_LS_OUT: 126.5,57.5 135.25,59.5
  rectangle net GND_HV_LS_IN: 126.5,54.75 135.25,56.75
Bottom Layer:
  rectangle net VIN: 20.75,66.5 25,74
  rectangle net GND_HV_LS_OUT: 92.5,112.5 125,125
  rectangle net GND_HV_LS_OUT: 92.5,76 100,123.5
  rectangle net GND_HV_LS_IN: 28,67 43,77
  rectangle net GND_HV_HS_OUT: 66,98 87,125
  rectangle net GND_HV_HS_IN: 41,81 58,125
  rectangle net GND_HV_HS_OUT: 75,46 99,65
  rectangle net GND_HV_HS_OUT: 75,46 90.5,105
  rectangle net GND_HV_HS_IN: 47,46 64,91
  rectangle net GND_HV_LS_IN: 19,114 31,125
  rectangle net GND_HV_LS_IN: 28,48 34,125

## Silkscreen, mask and mechanical layers (free items; w line width, h text height)
Top Overlay:
  lines w0.254: 51,31 51,91 111,91 111,31 51,31

## Dimensions
180,126.25 to 181,25 on Top Layer
18,128.75 to 177.75,128.5 on Top Layer